# Altium PCB PCB_031K6_V10_AD17.PcbDoc
Units mm, origin at the board's own origin, x right, y up, seen from the top; angles counter-clockwise.
Board outline 36.45 x 71.03 mm, 2 copper layers (Top Layer, Bottom Layer); 63 components, 70 nets, 258 pads, 123 vias.
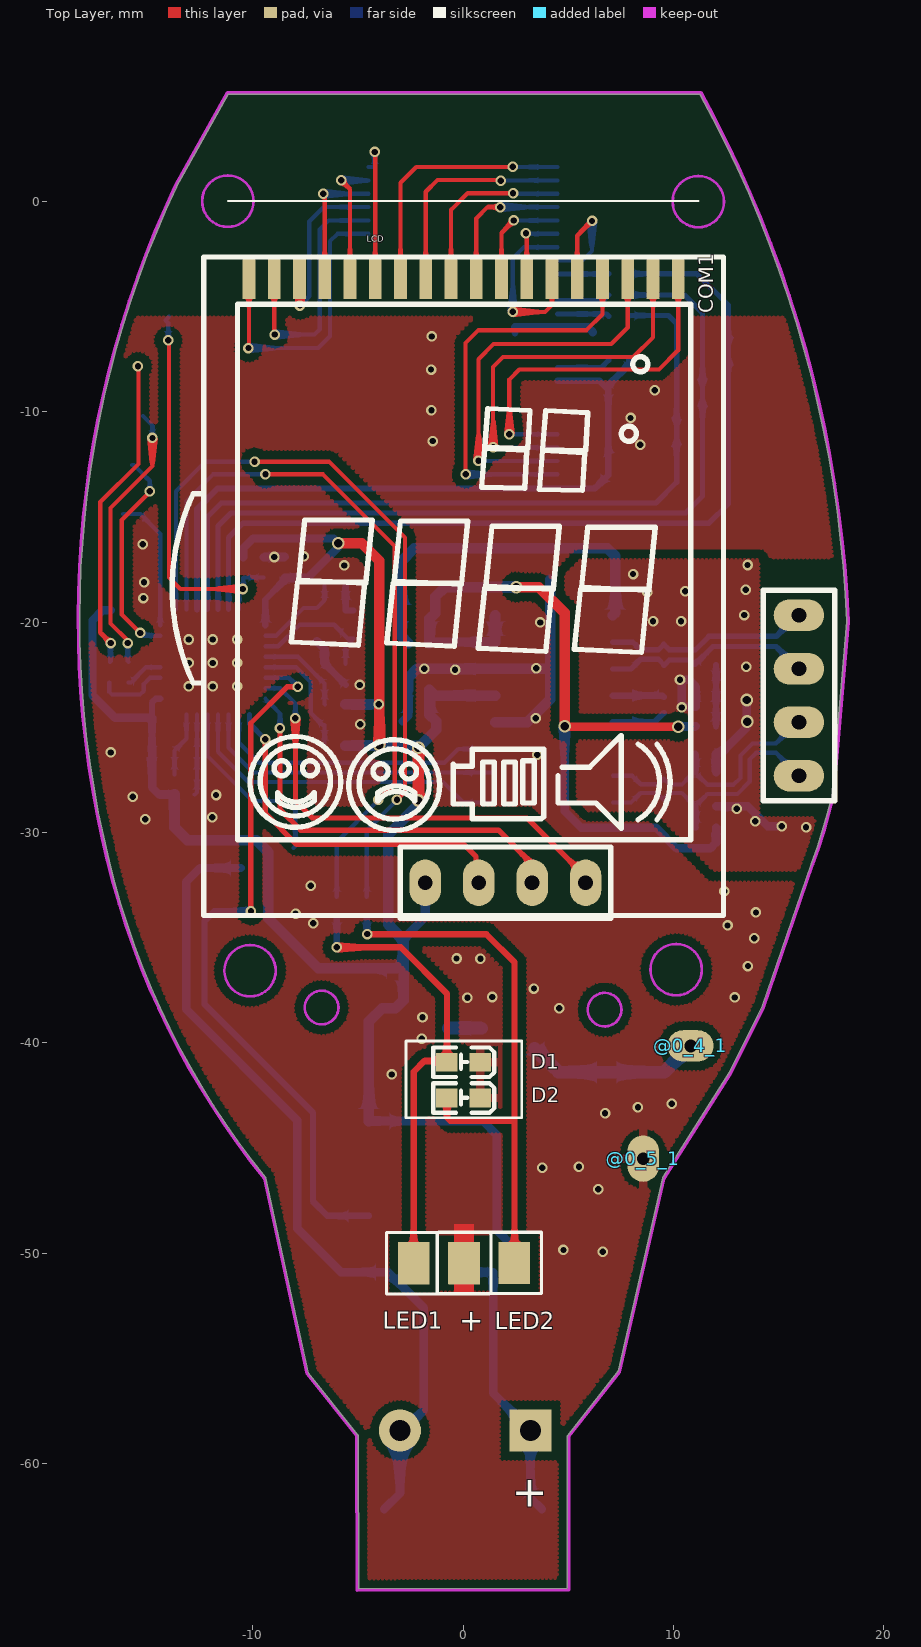
[diagram p0: Top Layer view]
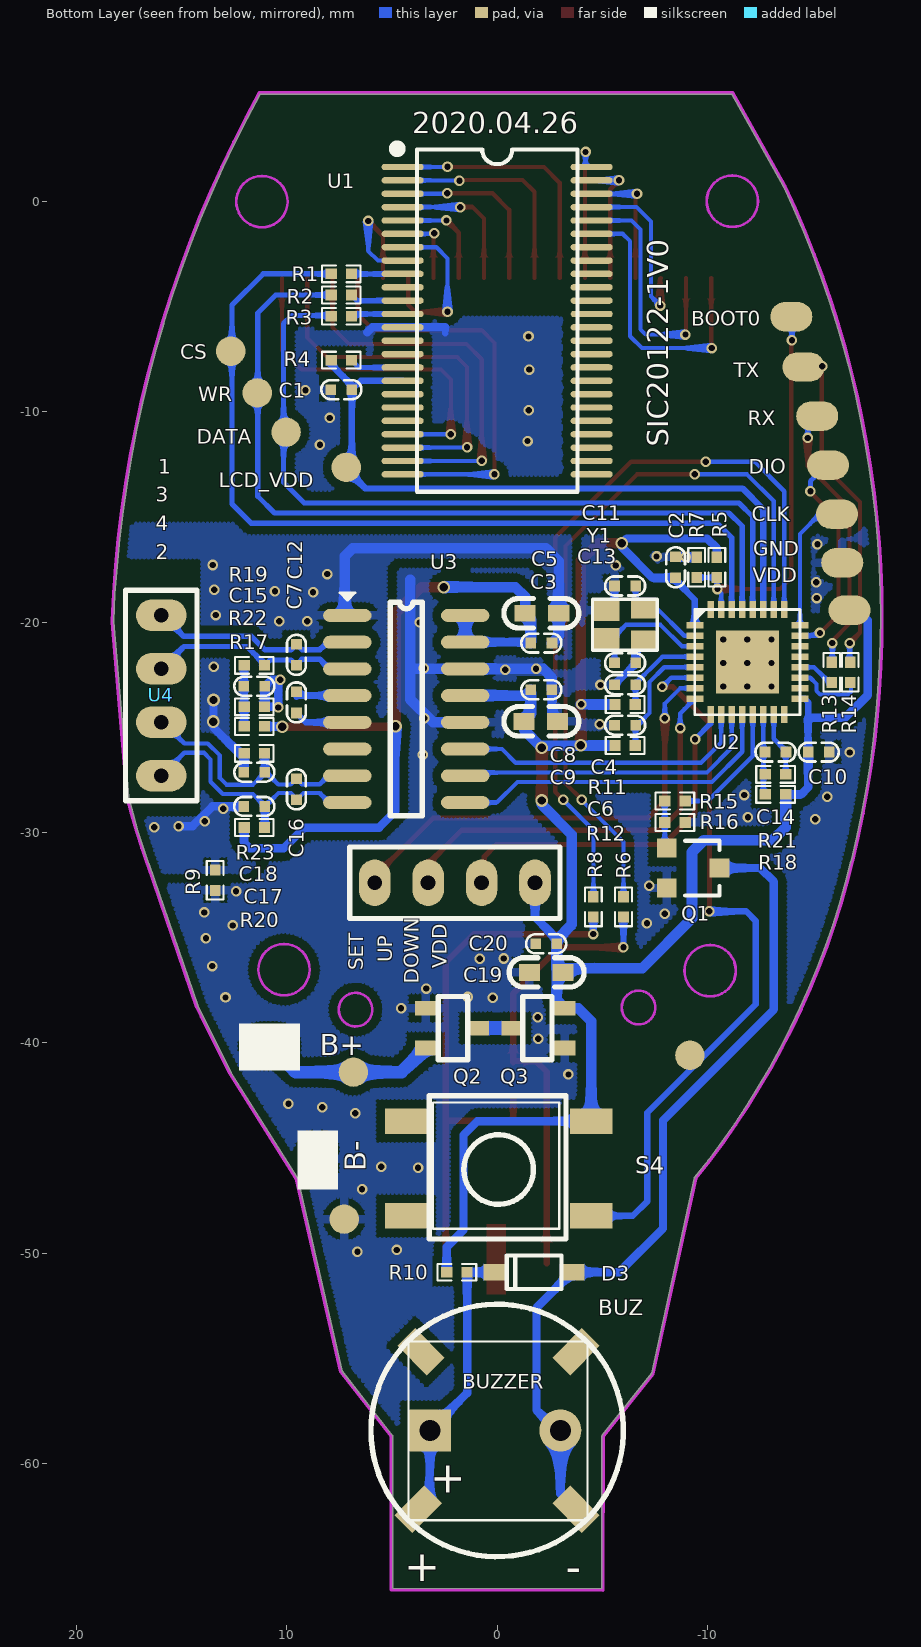
[diagram p1: Bottom Layer view, seen from below]

## Layer stack, top to bottom
Top Solder: solder mask 0.0102, Solder Resist, Dk 3.5
Top Layer: signal copper 0.0356
Dielectric 1: dielectric 0.32, FR-4, Dk 4.8
Bottom Layer: signal copper 0.0356
Bottom Solder: solder mask 0.0102, Solder Resist, Dk 3.5

## Board outline
-7.345,-55.699 -4.999,-58.631 ccw(c-5.058,-58.678) -4.999,-58.631 cw(c-5.058,-58.678) -4.982,-58.678 -4.961,-65.941 4.955,-65.922 4.955,-58.701 cw(c5.03,-58.701) 4.971,-58.654 7.366,-55.606 9.485,-46.421 cw(c9.559,-46.438) 9.495,-46.398 12.646,-41.41 13.995,-38.731 14.207,-38.273 16.536,-31.523 cw(c16.61,-31.539) 16.539,-31.513 ccw(c-10.201,-21.622) 16.546,-31.493 ccw(c-10.201,-21.622) 16.547,-31.491 ccw(c-10.201,-21.622) 17.51,-28.326 cw(c17.584,-28.343) 17.516,-28.31 cw(c17.591,-28.311) 17.516,-28.305 18.231,-19.995 cw(c18.306,-20.001) 18.234,-19.982 cw(c18.305,-19.956) 18.229,-19.959 ccw(c-38.433,-22.235) 11.256,5.093 -11.155,5.093 -13.6,0.714 cw(c-13.666,0.751) -13.607,0.703 cw(c-13.681,0.718) -13.613,0.686 ccw(c29.81,-19.84) -16.819,-31.353 cw(c-16.891,-31.375) -16.818,-31.357 ccw(c20.247,-22.39) -16.814,-31.373 ccw(c20.247,-22.39) -16.813,-31.38 ccw(c20.247,-22.39) -9.389,-46.389 cw(c-9.448,-46.436) -9.386,-46.393 cw(c-9.441,-46.445) -9.367,-46.429

## Design rules (kind name [scope] priority, off if disabled: settings)
Clearance Clearance_1 [InPolygon] p1: gap=0.4 ignorepadtopadclearanceinfootprint=FALSE except(0: Arc-Hole Track-Hole SMDPad-Hole THPad-Hole Via-Hole Fill-Hole Poly-Hole Region-Hole Text-Hole)
Clearance [All] p2: gap=0.18 ignorepadtopadclearanceinfootprint=FALSE except(0: Arc-Hole Track-Hole SMDPad-Hole THPad-Hole Via-Hole Fill-Hole Poly-Hole Region-Hole Text-Hole)
ComponentClearance [All] p1: gap=0 collisioncheckmode=3 verticalgap=0 showdistances=FALSE
HoleToHoleClearance [All] p1 off: gap=0.254 allowstackedmicrovias=TRUE
MinimumSolderMaskSliver [All] p1 off: minsoldermaskwidth=0.254
NetAntennae [All] p1 off: netantennaetolerance=0
PolygonConnect PolygonConnect_1 [IsVia] p1: connectstyle=Direct reliefconductorwidth=0.254 reliefentries=4 polygonreliefangle="90 Angle" airgapwidth=0.254
PolygonConnect [All] p2: connectstyle=Relief reliefconductorwidth=0.4 reliefentries=4 polygonreliefangle="90 Angle" airgapwidth=0.3
RoutingCorners [All] p1: cornerstyle=45-Degree minsetback=0.2 maxsetback=0.2
RoutingVias [All] p1: holewidth=0.711 width=1.27 viastyle="Through Hole" minholewidth=0.3 minwidth=0.5 maxholewidth=0.711 maxwidth=1.27
SilkToSilkClearance [All] p1 off: silktosilkclearance=0.254
SilkToSolderMaskClearance [IsPad] p1 off: minsilkscreentomaskgap=0.254 clearancetoexposedcopper=TRUE
SolderMaskExpansion [All] p1: expansion=0.102
Width [All] p1: maxlimit=2 minlimit=0.2 preferedwidth=0.254 minimp=50.000000 maximp=50.000000 favimp=50.000000
23 further rules are at their usual default settings.

## Components (designator, comment, footprint, x,y, rotation, side; value= is the part's Value field where it differs from the comment)
@0_4_1 "FPAD_2" FPAD_2 10.814,-40.146 r180 top
@0_5_1 "FPAD_2" FPAD_2 8.56,-45.503 r90 top
BUZ "Bell" BUZZER_552 1.713,-60.389 r270 bottom locked
BUZ1 "BUZZER" BUZZERA 3.199,-58.42 r180 bottom
C1 "105" 0402C 7.403,-8.955 r180 bottom
C2 "105" 0402C -8.48,-17.4 r90 bottom
C3 "120pF" 0402C -2.102,-21 r180 bottom
C4 "105" 0402C -6.08,-22.977 r0 bottom
C5 "105" 0603C -2.127,-19.58 r0 bottom
C6 "105" 0402C -6.08,-24.9 r0 bottom
C7 "104" 0402C 9.54,-23.82 r90 bottom
C8 "104" 0402C -2.102,-23.22 r0 bottom
C9 "10uF" 0603C -2.077,-24.72 r180 bottom
C10 "105" 0402C -15.28,-26.18 r180 bottom
C11 "20pF" 0402C -6.08,-18.286 r0 bottom
C12 "104" 0402C 9.54,-21.56 r270 bottom
C13 "20pF" 0402C -6.08,-21.938 r180 bottom
C14 "105" 0402C -13.23,-26.18 r180 bottom
C15 "104" 0402C 11.54,-23.05 r180 bottom
C16 "104" 0402C 9.54,-27.952 r270 bottom
C17 "NC" 0402C 11.54,-28.764 r0 bottom
C18 "NC" 0402C 11.54,-27.14 r180 bottom
C19 "106" 0603C -2.327,-36.65 r180 bottom
C20 "104" 0402C -2.327,-35.292 r0 bottom
D1 "GREEN" LED3(1和2标识) 0.024,-40.92 r90 top
D2 "RED" LED3(1和2标识) 0.024,-42.62 r90 top
D3 "1N4148" SOD-123 -1.758,-50.901 r0 bottom
LCD "" LCDHT02958 -12.321,-2.65 r0 top locked
Q1 "NPN" SOT-23(OK) -9.31,-31.69 r270 bottom
Q2 "AO3401" MOS管 2.095,-39.299 r270 bottom
Q3 "AO3401" MOS管 -1.912,-39.299 r90 bottom
R1 "100" 0402R 7.403,-3.454 r90 bottom
R2 "100" 0402R 7.403,-4.461 r90 bottom
R3 "100" 0402R 7.403,-5.467 r90 bottom
R4 "100" 0402R 7.403,-7.557 r90 bottom
R5 "NC" 0402R -10.44,-17.4 r180 bottom
R6 "100" 0402R -6,-33.54 r180 bottom
R7 "10K" 0402R -9.48,-17.4 r180 bottom
R8 "100" 0402R -4.573,-33.54 r180 bottom
R9 "0R" 0402R 13.4,-32.27 r180 bottom
R10 "100" 0402R 1.911,-50.901 r270 bottom
R11 "10K" 0402R -6.08,-23.917 r90 bottom
R12 "0000" 0402R -6.08,-25.87 r90 bottom
R13 "100" 0402R -15.901,-22.39 r0 bottom
R14 "100" 0402R -16.78,-22.39 r0 bottom
R15 "10K" 0402R -8.451,-28.505 r270 bottom
R16 "100K" 0402R -8.451,-29.525 r90 bottom
R17 "15K,1%" 0402R 11.54,-24.96 r90 bottom
R18 "1M,1%" 0402R -13.23,-28.19 r90 bottom
R19 "1K" 0402R 11.54,-22.06 r90 bottom
R20 "51K,1%" 0402R 11.54,-29.764 r270 bottom
R21 "1M,1%" 0402R -13.23,-27.24 r270 bottom
R22 "10K,1%" 0402R 11.54,-24.03 r270 bottom
R23 "51K,1%" 0402R 11.54,-26.24 r270 bottom
S4 "Measure" TACTSWITCH6X6 -0.072,-46.12 r0 bottom locked
U1 "SC1621" SSOP48 0,-13.808 r270 bottom locked
U2 "031K6" QFN32(5*5) -11.895,-21.901 r180 bottom locked
U3 "CS1259B" SOP16 7.119,-19.687 r180 bottom locked
U4 "IR" 4P#1 15.96,-23.49 r180 bottom locked
U4 "IR" 4P#2 2.011,-32.39 r270 bottom
Y1 "8MHZ" 3225 -6.08,-20.124 r180 bottom
? "LED1" LED1 0.05,-50.473 r0 top
? "LED1$2F$2" LED1$2F$2 0.043,-50.454 r180 top

## Footprints (in the part's own frame and the unit in brackets; to place one, negate y for a bottom-side part, rotate by r counter-clockwise, add the part's x,y. Pads: shape width x height; smd on the part's side, far side on the other; paste and mask are expansions set on the pad)
4P#1 [mm]
  oval 2.4x1.5 hole 0.7: 1(0,3.81) 2(0,1.27) 3(0,-1.27) 4(0,-3.81)
  silkscreen extent -1.7,-5 1.7,5
4P#2 [mm]
  oval 2.2x1.5 hole 0.7: 1(0,3.81) 2(0,1.27) 3(0,-1.27) 4(0,-3.81)
  silkscreen extent -1.7,-5 1.7,5
0402C [mil]
  rect 20x20 smd: 1(19.69,0) 2(-19.68,0)
  silkscreen extent -37,-18 37,18, body extent -20,-10 20,10, height 13
0402R [mm]
  rect 0.508x0.535 smd: 1(0,0.483) 2(0,-0.483)
  silkscreen extent -0.4,-0.92 0.4,0.92, body extent -0.25,-0.49 0.24,0.5, height 0.49
0603C [mm]
  rect 1x0.8 smd: 1(-0.8,0) 2(0.8,0)
  silkscreen extent -1.76,-0.7 1.81,0.7, body extent -0.8,-0.4 0.8,0.4, height 0.83
3225 [mm]
  rect 1.2x1 smd: 1(-0.87,-0.67) 2(0.87,-0.79) 3(0.87,0.79) 4(-0.87,0.675)
  silkscreen extent -1.55,-1.22 1.53,1.21
BUZZER_552 [mm]
  rect 2x1.2 smd rot 135: 1(1.778,-2.032) 2(-5.715,5.461)
  rect 2x1.2 smd rot 45: G(-5.715,-1.905) G(1.778,5.461)
  silkscreen extent -6.2,-2.5 2.3,6
BUZZERA [mm]
  rect 2x2 hole 1: 1(0,0)
  round 2 hole 1: 2(6.2,0)
  silkscreen extent -2.8,-6 9.2,6
FPAD_2 [mm]
  oval 2.2x1.5 hole 0.6: 1(0,0)
LCDHT02958 [mm]
  rect 0.6x2 smd: 1(2.15,-1) 2(3.35,-1) 3(4.55,-1) 4(5.75,-1) 5(6.95,-1) 6(8.15,-1) 7(9.35,-1) 8(10.55,-1) 9(11.75,-1) 10(12.95,-1) 11(14.15,-1) 12(15.35,-1) 13(16.55,-1) 14(17.75,-1) 15(18.95,-1) 16(20.15,-1) 17(21.35,-1) 18(22.55,-1)
  silkscreen extent -1.5,-31.3 24.7,0
LED1 [mm]
  rect 1.5x2 smd: 1(0,0) 2(-2.4,0)
  silkscreen extent -3.68,-1.46 1.27,1.46
LED1$2F$2 [mm]
  rect 1.5x2 smd: 1(0,0) 2(-2.4,0)
  silkscreen extent -3.68,-1.46 1.27,1.46
LED3(1和2标识) [mil]
  rect 35x40 smd: 1(0,31.13) 2(0,-31.13)
  silkscreen extent -28,-58 27,57
MOS管 [mm]
  rect 0.7x1 smd: 1(-0.95,-1.3) 2(0.95,-1.3) 3(0,1.2)
  silkscreen extent -1.5,-0.7 1.5,0.7
QFN32(5*5) [mm]
  rect 0.8x0.3 smd: 1(-2.5,1.75) 2(-2.5,1.25) 3(-2.5,0.75) 4(-2.5,0.25) 5(-2.5,-0.25) 6(-2.5,-0.75) 7(-2.5,-1.25) 8(-2.5,-1.75) 17(2.5,-1.75) 18(2.5,-1.25) 19(2.5,-0.75) 20(2.5,-0.25) 21(2.5,0.25) 22(2.5,0.75) 23(2.5,1.25) 24(2.5,1.75)
  rect 0.3x0.8 smd: 9(-1.75,-2.5) 10(-1.25,-2.5) 11(-0.75,-2.5) 12(-0.25,-2.5) 13(0.25,-2.5) 14(0.75,-2.5) 15(1.25,-2.5) 16(1.75,-2.5) 25(1.75,2.5) 26(1.25,2.5) 27(0.75,2.5) 28(0.25,2.5) 29(-0.25,2.5) 30(-0.75,2.5) 31(-1.25,2.5) 32(-1.75,2.5)
  rect 3x3 smd: ""(0,0)
  silkscreen extent -2.5,-2.5 2.5,2.5
SOD-123 [mm]
  rect 1.2x0.8 smd: 1(-1.8,0) 2(1.8,0)
  silkscreen extent -1.3,-0.8 1.3,0.8, body extent -1.85,-0.8 1.85,0.8, height 1.2
SOP16 [mm]
  oval 2.3x0.61 smd: 1(0,0) 2(0,-1.27) 3(0,-2.54) 4(0,-3.81) 5(0,-5.08) 6(0,-6.35) 7(0,-7.62) 8(0,-8.89) 9(5.6,-8.89) 10(5.6,-7.62) 11(5.6,-6.35) 12(5.6,-5.08) 13(5.6,-3.81) 14(5.6,-2.54) 15(5.6,-1.27) 16(5.6,0)
  silkscreen extent -0.36,-9.53 3.56,1.08
SOT-23(OK) [mm]
  rect 0.9x0.95 smd: 1(-0.95,-1.25) 2(0,1.25) 3(0.95,-1.25)
  silkscreen extent -1.3,-0.38 1.3,1.25
SSOP48 [mm]
  oval 0.305x2 smd: 1(-15.431,-4.491) 2(-14.797,-4.491) 3(-14.162,-4.491) 4(-13.527,-4.491) 5(-12.891,-4.491) 6(-12.257,-4.491) 7(-11.622,-4.491) 8(-10.986,-4.491) 9(-10.352,-4.491) 10(-9.717,-4.491) 11(-9.081,-4.491) 12(-8.446,-4.491) 13(-7.812,-4.491) 14(-7.177,-4.491) 15(-6.542,-4.491) 16(-5.907,-4.491) 17(-5.272,-4.491) 18(-4.636,-4.491) 19(-4.002,-4.491) 20(-3.367,-4.491) 21(-2.731,-4.491) 22(-2.096,-4.491) 23(-1.462,-4.491) 24(-0.826,-4.491) 25(-0.827,4.491) 26(-1.461,4.491) 27(-2.097,4.491) 28(-2.732,4.491) 29(-3.367,4.491) 30(-4.002,4.491) 31(-4.637,4.491) 32(-5.271,4.491) 33(-5.906,4.491) 34(-6.542,4.491) 35(-7.177,4.491) 36(-7.811,4.491) 37(-8.447,4.494) 38(-9.082,4.491) 39(-9.717,4.491) 40(-10.352,4.491) 41(-10.987,4.491) 42(-11.621,4.491) 43(-12.256,4.491) 44(-12.892,4.491) 45(-13.526,4.491) 46(-14.161,4.491) 47(-14.797,4.491) 48(-15.432,4.491)
  silkscreen extent -16.5,-4.95 0,3.81
TACTSWITCH6X6 [mm]
  rect 2x1.2 smd: 1(-4.4,2.1) 2(-4.4,-2.4) 3(4.4,2.1) 4(4.4,-2.4)
  silkscreen extent -3.2,-3.6 3.3,3.2

## Part data
BUZ: "Electrical Bell"
BUZ1: library part Speaker
C1 C2 C3 C4 C5 C6 C7 C8 C9 C10 C11 C12 C13 C14 C15 C16 C17 C18 C19 C20: library part Cap, "Capacitor"
D1 D2: library part LED0, "Typical INFRARED GaAs LED"
D3: library part Diode, "Default Diode"
LCD: library part LCD-4*14, "LCD Displayer"
Q1: "NPN Bipolar Transistor"
Q2 Q3: library part PMOS-2, "P-Channel Power MOSFET"
R1 R2 R3 R4 R5 R6 R7 R8 R9 R10 R11 R12 R13 R14 R15 R16 R17 R18 R19 R20 R21 R22 R23: library part Res1, "Resistor"
S4: library part SW-PB, "Switch"
U1: "32X4 LCD Driver"
U2: library part STM32F031K6, "CM0 UFQFPN32"
U3: "chipsea SD ADC"
U4 U4: library part Sensor, "ntc ,TP"
Y1: library part XTAL, "Crystal Oscillator"

## Free pads (board coordinates)
  round 1.4 smd far side: 2(-9.16,-40.59) 2(6.83,-41.39) 2(7.27,-48.374) 4(7.169,-12.65) 4(10.03,-10.976) 4(11.4,-9.11) 4(12.66,-7.13)
  oval 2x1.4 smd far side: 4(-16.75,-19.44) 4(-16.4,-17.18) 4(-16.15,-14.87) 4(-15.72,-12.54) 4(-15.21,-10.21) 4(-14.56,-7.88) 4(-13.98,-5.49)

## Via types
v1: diameter 0.5, hole 0.3, Top Layer to Bottom Layer, 114 vias
v2: diameter 0.6, hole 0.4, Top Layer to Bottom Layer, 9 vias

## Nets (pads, with @x,y where several pads share a name; then routed paths per layer and width w, separated by ;. In a path a pad name is that pad's centre, name@x,y a point inside that pad or via, vN(x,y) a via of type N, cw(c..) or ccw(c..) an arc to the next point about the centre after c; other vN are vias at no path point)
AGND: C3.1 C5.1 C15.1 C17.1 C18.2 R9.1 R22.1 R23.2 U3.1 | length 29
  Bottom Layer w0.4: C17.1 13.534,-28.764 14.47,-29.7 v1(15.14,-29.7) ; C18.2 12.023,-27.123 R23.2 12.25,-26.24 13.48,-25.01 v2(13.48,-23.704) ; v1(10.31,-22.74) 10.73,-22.74 C15.1 11.04,-24.014 R22.1 10.43,-24.03 v1(10.401,-24.06) 10.401,-22.831 v1(10.31,-22.74)
  Bottom Layer w0.5: C3.1 -2.927,-20.675 C5.1 -2.927,-17.107 -2.32,-16.5 6.86,-16.5 7.243,-16.883 7.243,-17.71 7.243,-19.563 U3.1
  other v1: 16.3,-29.76 13.89,-29.47 13.01,-28.88 13.464,-22.13 9.029,-19.96 10.36,-19.97 13.369,-19.67 8.75,-18.59 10.56,-18.53 13.44,-18.464 8.08,-17.72 13.52,-17.29
  other v2: 13.5,-24.73
AI0: C12.2 U3.2 U4.1@15.96,-19.68 | length 9.9
  Bottom Layer w0.25: U3.2 8.067,-20.957 8.43,-21.32 9.28,-21.32 C12.2 9.803,-21.323 11.037,-21.323 11.68,-20.68 14.89,-20.68 15.89,-19.68 U4.1@15.96,-19.68
AI1: C12.1 R19.2 U3.3 U4.2@15.96,-22.22 | length 10.2
  Bottom Layer w0.25: U3.3 7.973,-22.227 8.43,-21.77 9.282,-21.77 9.54,-22.028 C12.1 9.543,-22.06 9.8,-21.803 10.8,-21.803 11.021,-22.024 11.881,-21.164 14.884,-21.164 15.94,-22.22 U4.2@15.96,-22.22
AIN0: 
AIN1: 
AIN2: C16.1 C17.2 R20.1 U3.8 U4.4@15.96,-27.3 | length 12.8
  Bottom Layer w0.2: U3.8 7.984,-28.577 8.441,-28.12 9.208,-28.12 C16.1 9.54,-28.378 9.798,-28.12 10.396,-28.12 C17.2 ; C17.2@11.028,-28.751 11.609,-28.17 13.04,-28.17 13.62,-27.59 13.62,-26.527 13.937,-26.21 14.87,-26.21 U4.4@15.96,-27.3
  Bottom Layer w0.3: C17.2 11.04,-29.747 R20.1
AIN3: C16.2 C18.1 R23.1 U3.7 U4.3@15.96,-24.76 | length 12.5
  Bottom Layer w0.2: U3.7 8.037,-27.307 8.44,-27.71 9.282,-27.71 C16.2 9.808,-27.72 10.401,-27.72 10.981,-27.14 C18.1 ; C18.1@11.027,-27.152 11.605,-27.73 12.858,-27.73 13.18,-27.408 13.18,-26.345 13.755,-25.77 14.87,-25.77 15.88,-24.76 U4.3@15.96,-24.76 ; R23.1@11.04,-26.257 R23.1
  Bottom Layer w0.3: C18.1 R23.1@11.04,-26.257
BOOT0: pad.4@-13.98,-5.49 R5.2 R7.2 U2.31 | length 18.8
  Top Layer w0.2: v1@-13.98,-6.6 -13.98,-17.89 -13.44,-18.43 v1(-10.47,-18.43)
  Bottom Layer w0.2: v1(-14.01,-6.61) -14.01,-5.796 -14.148,-5.658 pad.4@-13.98,-5.49 ; U2.31 -10.645,-18.635 -10.44,-18.43 R5.2 R7.2
BOOT1: 
COM0: LCD.18 U1.21 | length 16.9
  Top Layer w0.2: v1@2.2,-11.08 2.2,-8.47 2.67,-8 9.31,-8 10.229,-7.081 LCD.18
  Bottom Layer w0.2: v1@2.2,-11.08 2.204,-11.076 U1.21
  other v1: 2.2,-11.076
COM1: LCD.17 U1.22 | length 17.9
  Top Layer w0.2: v1@1.43,-11.66 1.43,-7.88 1.9,-7.41 8.09,-7.41 9.029,-6.471 LCD.17
  Bottom Layer w0.2: v1@1.43,-11.66 1.481,-11.711 U1.22
  other v1: 1.43,-11.69
COM2: LCD.16 U1.23 | length 18.6
  Top Layer w0.2: v1@0.71,-12.26 0.73,-12.24 0.73,-7.51 1.45,-6.79 7.04,-6.79 7.829,-6.001 LCD.16
  Bottom Layer w0.2: v1@0.744,-12.346 U1.23
  other v1: 0.73,-12.33
COM3: LCD.15 U1.24 | length 19.4
  Top Layer w0.2: v1@0.12,-12.94 0.12,-6.74 0.73,-6.13 5.87,-6.13 6.629,-5.371 LCD.15
  Bottom Layer w0.2: v1(0.129,-12.981) U1.24
GND: ?.1 @0_5_1.1 C1.2 C2.1 C4.1 C6.1 C8.2 C9.2 C10.1 C11.1 C13.1 C19.1 C20.1 D1.2 D2.2 pad.2@7.27,-48.374 pad.4@-16.4,-17.18 Q1.3 Q2.1 Q3.1 R7.1 R9.2 R16.2 U1.13 U2. U3.12 U3.14 Y1.2 Y1.4 | length 27
  Bottom Layer w0.3: C13.1@-6.58,-21.978 -6.579,-21.978 C4.1 ; C11.1 -5.58,-19.449 Y1.4 ; 2.47,-6.27 2.47,-5.996
  Bottom Layer w0.4: R7.1 -8.497,-16.917 C2.1 ; Y1.2 -6.58,-21.284 C13.1@-6.58,-21.978 ; C9.2 -2.602,-24.445 C8.2 ; 2.47,-5.996 5.944,-5.996 6.169,-6.221
  Bottom Layer w0.5: C8.2 -2.602,-22.642 -2.187,-22.227 U3.14 4.06,-22.227 ; U3.12 3.043,-24.767 4.14,-23.67 4.14,-21.54 ; 4.14,-21.51 4.14,-17.98
  other v1: 6.64,-49.92 4.77,-49.84 6.42,-46.95 3.76,-45.94 5.507,-45.88 6.75,-43.34 8.31,-43.058 9.92,-42.9 -3.388,-41.5 -1.96,-39.8 -1.927,-38.781 4.569,-38.349 0.21,-37.854 12.91,-37.84 1.39,-37.82 3.369,-37.42 13.54,-36.35 -0.308,-35.99 0.828,-36.001 13.84,-35.03 12.57,-34.42 -7.12,-34.31 -7.96,-33.87 13.92,-33.8 12.409,-32.795 -7.231,-32.54 -15.11,-29.37 -11.92,-29.28 -15.69,-28.3 -11.74,-28.22 3.53,-26.31 -16.75,-26.2 -4.88,-24.86 3.46,-24.57 -13.04,-23.063 -11.89,-23.063 -10.74,-23.063 -4.91,-22.989 -0.38,-22.269 -1.85,-22.221 3.48,-22.2 -13.04,-21.946 -11.89,-21.946 -10.74,-21.946 -13.04,-20.83 -11.89,-20.83 -10.74,-20.83 3.675,-20.02 -15.19,-18.86 -15.16,-18.11 -5.64,-17.311 -8.97,-16.91 -7.574,-16.883 -15.22,-16.3 8.42,-11.58 -1.446,-11.4 7.96,-10.3 -1.501,-9.93 9.11,-8.99 -1.52,-8 -1.49,-6.43
NetBUZ_1: BUZ1.1 BUZ.1 D3.2 R10.1 | length 13.6
  Bottom Layer w0.4: D3.2 R10.1 1.428,-56.649 BUZ1.1 3.199,-61.62 BUZ.1
NetBUZ_2: BUZ1.2 BUZ.G@-3.748,-62.167 D3.1 Q1.2 | length 39.5
  Bottom Layer w0.4: Q1.2 -12.5,-31.69 -13.15,-32.34 -13.15,-38.41 -7.88,-43.68 -7.88,-48.82 -5.799,-50.901 D3.1 -1.87,-52.59 -1.87,-57.45 -2.84,-58.42 BUZ1.2 -3.002,-61.42 BUZ.G@-3.748,-62.167
NetC7_1: C7.1 U3.4 | length 2.4
  Bottom Layer w0.3: U3.4 9.477,-23.497 C7.1@9.54,-23.56
NetC7_2: C7.2 U3.5 | length 2.6
  Bottom Layer w0.3: U3.5 9.093,-24.767 C7.2
NetC15_2: C15.2 R17.1 R19.1 R22.2 | length 2.9
  Bottom Layer w0.3: R17.1 R22.2 R19.1
NetD1_1: ?.2@-2.35,-50.473 D1.1 R6.2 | length 21.8
  Top Layer w0.3: v1(-6,-35.46) -2.959,-35.46 -0.767,-37.652 D1.1 -0.827,-40.86 -1.84,-40.86 -2.35,-41.37 ?.2@-2.35,-50.473
  Bottom Layer w0.3: v1(-6,-35.46) R6.2
NetD2_1: ?.2@2.443,-50.455 D2.1 R8.2 | length 26.9
  Top Layer w0.3: v1@-4.6,-34.84 1.11,-34.84 2.443,-36.173 2.443,-43.65 ; D2.1 -0.767,-43.543 -0.61,-43.7 2.393,-43.7 2.443,-43.65 ; ?.2@2.443,-50.455 2.443,-43.65
  Bottom Layer w0.3: v1@-4.573,-34.817 R8.2
  Bottom Layer w0.4: v1@-4.573,-34.817 v1(-4.56,-34.83)
NetQ1_2: Q1.1 R15.2 R16.1 | length 2.3
  Bottom Layer w0.2: Q1.1 -7.968,-30.648 R15.2
NetQ2_2: Q2.3 Q3.3 | length 1.6
  Bottom Layer w0.6: Q3.3 Q2.3
NetR1_2: R1.2 U1.9 | length 2.4
  Bottom Layer w0.25: U1.9 6.917,-3.456 R1.2
NetR2_2: R2.2 U1.11 | length 2.5
  Bottom Layer w0.25: U1.11 6.654,-4.726 R2.2
NetR3_2: R3.2 U1.12 | length 2.5
  Bottom Layer w0.25: U1.12 6.813,-5.361 R3.2
NetR4_2: R4.2 U1.16 | length 2.6
  Bottom Layer w0.25: U1.16 6.575,-7.901 R4.2
NRST: C4.2 R11.2 U2.4 | length 4.3
  Bottom Layer w0.2: U2.4 -7.849,-21.651 -6.58,-22.92 C4.2 -6.58,-23.901 R11.2
PA0: pad.2@-9.16,-40.59 S4.1 U2.6 | length 34.4
  Top Layer w0.25: v1(-10.08,-33.75) -10.09,-33.74 -10.09,-24.81 -8.36,-23.08 v1(-7.849,-23.08)
  Bottom Layer w0.2: U2.6 -8.278,-22.651 v1(-7.849,-23.08)
  Bottom Layer w0.3: v1(-10.08,-33.75) -11.83,-33.75 -12.29,-34.21 -12.29,-38.16 -7.13,-43.32 -7.13,-47.54 -6.45,-48.22 S4.1
PA1: U2.7 U4.4@5.821,-32.39 | length 21.9
  Top Layer w0.25: v1@-7.968,-24.63 -7.968,-28.505 -7.163,-29.31 3.04,-29.31 5.77,-32.04 U4.4@5.77,-32.41
  Bottom Layer w0.2: U2.7 -8.689,-23.151 -7.968,-23.872 v1(-7.968,-24.58)
PA2: U2.8 U4.3@3.281,-32.39 | length 19.5
  Top Layer w0.25: v1@-8.701,-25.05 -8.701,-28.905 -7.716,-29.89 1.68,-29.89 3.281,-31.491 U4.3@3.281,-32.41
  Bottom Layer w0.2: U2.8 -8.7,-24.346 v1(-8.7,-25.04)
PA3: U2.9 U4.2@0.741,-32.39 | length 17.1
  Top Layer w0.25: v1@-9.4,-25.59 -9.4,-29.08 -7.91,-30.57 0.04,-30.57 0.61,-31.14 U4.2@0.61,-32.41
  Bottom Layer w0.25: U2.9 -10.145,-24.83 v1(-9.405,-25.57)
PA4: U2.10 U3.11 | length 14.2
  Bottom Layer w0.2: U2.10 -10.645,-25.735 -9.69,-26.69 -0.88,-26.69 -0.227,-26.037 U3.11
PA5: U2.11 U3.10 | length 14.8
  Bottom Layer w0.2: U2.11 -11.145,-25.975 -9.97,-27.15 1.362,-27.15 U3.10
PA6: U2.12 U3.9 | length 15.9
  Bottom Layer w0.2: U2.12 -11.645,-26.165 -10.21,-27.6 -0.96,-27.6 0.017,-28.577 U3.9
PA7: R15.1 U2.13 | length 6.1
  Bottom Layer w0.2: U2.13 -12.145,-26.37 -10.01,-28.505 R15.1
PA9: R14.1 U2.19 | length 3.4
  Bottom Layer w0.2: R14.1@-16.81,-22.873 -16.81,-23.32 -16.68,-23.45 -15.35,-23.45 -15.17,-23.27 -15.17,-22.944 -14.877,-22.651 U2.19
PA10: R13.1 U2.20 | length 1.8
  Bottom Layer w0.2: R13.1 -15.783,-22.873 -15.061,-22.151 U2.20
PA15: R8.1 U2.25 | length 36.4
  Top Layer w0.2: v1(-9.91,-12.38) -6.371,-12.38 -2.76,-15.991 -2.76,-28.07 v1(-3.14,-28.45)
  Bottom Layer w0.2: U2.25 -13.645,-13.785 -12.24,-12.38 v1(-9.91,-12.38) ; R8.1 -4.573,-29.893 -3.14,-28.46 v1(-3.14,-28.45)
PB0: C14.2 R18.1 R21.2 U2.14 | length 3.8
  Bottom Layer w0.2: R18.1 -12.645,-28.088 U2.14
PB1: C14.1 R21.1 U2.15 | length 3.1
  Bottom Layer w0.2: R21.1 -13.713,-26.113 -13.145,-25.545 U2.15
PB3: R6.1 U2.26 | length 34.7
  Top Layer w0.2: v1(-9.39,-12.98) -6.65,-12.98 -3.25,-16.38 -3.25,-27.67 v1(-4.02,-28.44)
  Bottom Layer w0.2: U2.26 -13.145,-14.245 -11.88,-12.98 v1(-9.39,-12.98) ; R6.1 -6,-30.45 v1@-4.06,-28.51
PB4: C1.1 pad.4@7.169,-12.65 R4.1 U1.17 U2.27 | length 33.4
  Bottom Layer w0.3: U2.27 -12.645,-14.634 -11.661,-13.65 6.27,-13.65 6.903,-13.017 C1.1 ; U1.17 6.484,-8.536 C1.1 ; R4.1 7.886,-7.764 6.903,-8.747 C1.1
PB5: pad.4@10.03,-10.976 R3.1 U2.28 | length 37.4
  Bottom Layer w0.25: U2.28 -12.145,-14.995 -11.49,-14.34 9.17,-14.34 10.15,-13.36 10.15,-5.82 9.76,-5.43 7.923,-5.43 R3.1
PB6: pad.4@11.4,-9.11 R2.1 U2.29 | length 40.1
  Bottom Layer w0.25: U2.29 -11.645,-15.445 -11.02,-14.82 10.58,-14.82 11.38,-14.02 11.38,-5.32 10.521,-4.461 R2.1
PB7: pad.4@12.66,-7.13 R1.1 U2.30 | length 42.6
  Bottom Layer w0.25: U2.30 -11.145,-15.985 -10.46,-15.3 11.69,-15.3 12.6,-14.39 12.6,-4.94 11.114,-3.454 R1.1
PF0: C11.2 U2.2 Y1.3 | length 4.2
  Bottom Layer w0.2: U2.2 -8.891,-20.651 -7.574,-19.334 Y1.3 -6.58,-18.964 C11.2
PF1: C13.2 U2.3 Y1.1 | length 6.2
  Bottom Layer w0.2: U2.3 -8.781,-21.151 -7.764,-20.134 -6.126,-20.134 -5.466,-20.794 Y1.1 -5.58,-21.164 C13.2@-5.58,-21.978
RX: pad.4@-15.21,-10.21 R13.2 | length 13.2
  Top Layer w0.2: v1(-15.93,-21) -15.93,-20.89 -16.75,-20.07 -16.75,-14.58 -14.76,-12.59 v1(-14.76,-11.25) v1@-14.76,-11.14
  Bottom Layer w0.2: v1(-15.93,-21) -15.93,-21.878 R13.2 ; pad.4@-15.21,-10.21 -14.76,-10.66 v1(-14.76,-11.25)
SEG0: LCD.14 U1.8 | length 6.3
  Top Layer w0.2: LCD.14 5.429,-1.641 v1(6.13,-0.94)
  Bottom Layer w0.2: U1.8 5.669,-2.821 6.13,-2.36 v1(6.13,-0.94)
SEG1: LCD.13 U1.7 | length 8.2
  Top Layer w0.2: v1(2.36,-5.26) 3.89,-5.26 4.229,-4.921 LCD.13
  Bottom Layer w0.2: v1(2.36,-5.26) 2.36,-2.72 2.894,-2.186 U1.7
SEG2: LCD.12 U1.6 | length 3.6
  Top Layer w0.2: v1(2.99,-1.53) 3.029,-1.569 LCD.12
  Bottom Layer w0.2: v1@2.99,-1.57 3.009,-1.551 U1.6
SEG3: LCD.11 U1.5 | length 5.1
  Top Layer w0.2: LCD.11 1.829,-1.497 v1(2.41,-0.916)
  Bottom Layer w0.2: v1(2.41,-0.916) U1.5
SEG4: LCD.10 U1.4 | length 6.9
  Top Layer w0.2: LCD.10 0.629,-0.821 1.169,-0.281 v1(1.761,-0.281)
  Bottom Layer w0.2: U1.4 v1(1.761,-0.281) ; v1@1.76,-0.28 v1(1.761,-0.281)
SEG5: LCD.9 U1.3 | length 8.6
  Top Layer w0.2: LCD.9 -0.571,-0.411 0.22,0.38 v1(2.376,0.38)
  Bottom Layer w0.2: v1@2.376,0.34 2.39,0.354 U1.3
SEG6: LCD.8 U1.2 | length 10.7
  Top Layer w0.2: LCD.8 -1.771,0.449 -1.21,1.01 1.72,1.01 v1@1.81,0.92
  Bottom Layer w0.2: v1(1.79,0.971) 1.808,0.989 U1.2
SEG7: LCD.7 U1.1 | length 12.3
  Top Layer w0.2: LCD.7 -2.971,0.879 -2.226,1.624 2.294,1.624 v1@2.36,1.69
  Bottom Layer w0.2: v1(2.36,1.64) 2.376,1.624 U1.1
SEG8: LCD.6 U1.48 | length 7
  Top Layer w0.2: v1(-4.2,2.34) -4.171,2.311 LCD.6
  Bottom Layer w0.2: U1.48 -4.276,1.624 -4.2,1.7 v1(-4.2,2.34)
SEG9: LCD.5 U1.47 | length 6.1
  Top Layer w0.2: v1(-5.791,0.989) -5.371,0.569 LCD.5
  Bottom Layer w0.2: v1@-5.8,0.98 v1(-5.791,0.989) U1.47
SEG10: LCD.4 U1.46 | length 6.2
  Top Layer w0.2: v1(-6.646,0.354) -6.571,0.279 LCD.4
  Bottom Layer w0.2: v1@-6.65,0.35 v1(-6.646,0.354) U1.46
SEG11: LCD.3 U1.45 | length 8.5
  Top Layer w0.2: LCD.3 -7.75,-3.671 v1(-7.75,-4.96)
  Bottom Layer w0.2: v1@-7.69,-4.9 -7.31,-4.52 -7.31,-0.97 -6.621,-0.281 U1.45
SEG12: LCD.2 U1.44 | length 12.2
  Top Layer w0.2: LCD.2 -8.971,-6.317 v1(-8.95,-6.338)
  Bottom Layer w0.2: v1(-8.95,-6.338) -7.058,-6.338 -6.81,-6.09 -6.81,-1.34 -6.386,-0.916 U1.44
SEG13: LCD.1 U1.43 | length 13.9
  Top Layer w0.2: v1(-10.2,-6.98) -10.171,-6.951 LCD.1
  Bottom Layer w0.2: v1(-10.2,-6.98) -6.88,-6.98 -6.32,-6.42 -6.32,-1.9 -5.971,-1.551 U1.43
SWCLK: pad.4@-16.15,-14.87 U2.24 | length 6.5
  Bottom Layer w0.2: pad.4@-16.15,-14.87 -15.33,-14.87 -14.39,-15.81 -14.39,-20.146 U2.24
SWDIO: pad.4@-15.72,-12.54 U2.23 | length 10.3
  Top Layer w0.2: v1(-15.34,-20.52) -16.22,-19.64 -16.22,-15.15 -14.9,-13.83 v1@-14.84,-13.83
  Bottom Layer w0.2: pad.4@-15.72,-12.54 -15.64,-12.54 -14.89,-13.29 v1(-14.89,-13.78) ; v1(-15.34,-20.52) -15.209,-20.651 U2.23
TX: pad.4@-14.56,-7.88 R14.2 | length 15
  Top Layer w0.2: v1(-16.75,-21) -17.24,-20.51 -17.24,-14.3 -15.43,-12.49 v1@-15.43,-7.86
  Bottom Layer w0.2: R14.2 -16.75,-21.877 v1(-16.75,-21)
  other v1: -15.45,-7.85
VBAT: @0_4_1.1 pad.2@6.83,-41.39 Q2.2 | length 8.4
  Bottom Layer w0.6: Q2.2 4.536,-41.39 6.83,-41.39 9.57,-41.39 10.814,-40.146
VDD: C2.2 C8.1 C9.1 C10.2 C19.2 C20.2 pad.4@-16.75,-19.44 Q3.2 R5.1 R10.2 R11.1 R12.1 R18.2 S4.2 U2.1 U2.17 U3.13 U4.1@-1.799,-32.39 | length 100.3
  Top Layer w0.5: v2(-5.93,-16.254) -4.816,-16.254 -3.98,-17.09 v2(-3.98,-25.86) ; v2(-2.12,-28.48) v2(-2.12,-25.97)
  Bottom Layer w0.3: C10.2 -14.78,-24.56 -14.78,-23.82 -14.611,-23.651 U2.17 ; U2.1 -9.395,-18.935 -8.48,-18.02 C2.2
  Bottom Layer w0.4: pad.4@-16.75,-19.44 -17.13,-19.44 -17.61,-19.92 -17.61,-23.48 -16.54,-24.55 -14.79,-24.55 -14.78,-24.56 ; C10.2 -14.78,-27.86 -14.45,-28.19 R18.2 ; R5.1 -10.44,-16.49 -9.98,-16.03 -6.154,-16.03 v2(-5.93,-16.254) -5.921,-16.254 -5.921,-16.432 -7.39,-17.9 C2.2 ; S4.2 0.94,-43.72 1.6,-44.38 1.6,-48.9 2.394,-49.694 R10.2 ; C20.2@-2.827,-35.092 -2.827,-35.047 -1.799,-34.019 U4.1@-1.799,-32.39
  Bottom Layer w0.5: R18.2 -13.713,-29.747 -13.1,-30.36 -9.83,-30.36 -9.26,-30.93 -9.26,-34.08 -6.89,-36.45 C19.2@-3.127,-36.45 ; R12.1 -2.22,-25.87 v2(-2.12,-25.97) -1.277,-25.127 C9.1 -1.602,-24.395 C8.1 -1.325,-23.497 U3.13 ; R11.1 v1@-3.978,-23.917 ; S4.2 -4.471,-38.972 -3.849,-38.349 Q3.2 -2.827,-37.964 -2.827,-35.092 -3.55,-34.369 -3.55,-30.1 -2.12,-28.67 v2(-2.12,-28.48)
  other v1: -4,-23.91
VDDA: C6.2 R12.2 U2.5 | length 5.8
  Bottom Layer w0.2: U2.5 -7.939,-22.151 -7.24,-22.85 -7.24,-24.33 -6.67,-24.9 C6.2 -6.58,-25.853 R12.2
VS: C3.2 C5.2 R17.2 R20.2 U3.15 U3.16 | length 38
  Top Layer w0.4: v2(4.83,-24.96) 4.84,-24.97 v2(10.22,-24.97)
  Top Layer w0.5: v2(2.53,-18.34) 3.6,-18.34 4.83,-19.57 v2(4.83,-24.96)
  Bottom Layer w0.4: C3.2 -1.559,-20.957 U3.15 ; v2(4.83,-24.96) 4.83,-28.99 5.61,-29.77 9.16,-29.77 10.15,-30.76 11.751,-30.76 12.023,-30.487 R20.2 ; v2(10.22,-24.97) 10.23,-24.96 R17.2
  Bottom Layer w0.5: C3.2 -1.602,-19.855 C5.2 -1.327,-18.807 -0.86,-18.34 v2(2.53,-18.34) ; U3.15 U3.16
pads on no net: BUZ.2 BUZ.G@3.618,-54.674 S4.3 S4.4 U1.10 U1.14 U1.15 U1.18 U1.19 U1.20 U1.25 U1.26 U1.27 U1.28 U1.29 U1.30 U1.31 U1.32 U1.33 U1.34 U1.35 U1.36 U1.37 U1.38 U1.39 U1.40 U1.41 U1.42 U2.16 U2.18 U2.21 U2.22 U2.32 U3.6

## Polygon pours and split planes (outlines as drawn)
AGND on Top Layer "Bottom Layer-GND" (hatched 90Degree grid 0.2 track 0.2, remove dead copper, pour order 0): 17.05,-31.83 17.01,-31.79 14.85,-31.79 11.91,-31.79 10.01,-29.89 9.07,-28.95 5.975,-28.95 5.44,-28.392 5.44,-26.18 5.44,-25.21 5.71,-24.94 5.09,-24.32 4.89,-24.32 4.89,-17.77 5.41,-17.25 5.6,-17.06 18.13,-17.06 18.32,-17.06 18.81,-17.55 18.97,-17.71 18.97,-22.44 18.97,-30.81 18.22,-31.56 17.98,-31.8 17.12,-31.8
GND on Top Layer "Bottom Layer-GND" (hatched 90Degree grid 0.2 track 0.2, remove dead copper, pour order 18): -28.42,10.36 -28.42,9.92 22.79,9.92 23.55,9.92 23.55,-37.01 23.55,-67.1 -21.85,-67.1 -28.09,-67.1 -28.09,9.92
AGND on Bottom Layer "Bottom Layer-GND" (hatched 90Degree grid 0.2 track 0.2, remove dead copper, pour order 2): 15.9,-31.89 11.87,-31.89 9.33,-29.35 9.07,-29.09 5.66,-29.09 5.29,-28.72 5.29,-27.57 5.29,-17.311 4.969,-16.99 4.879,-16.9 -1.2,-16.9 -1.75,-16.9 -2.23,-17.38 -2.44,-17.59 -2.44,-19.76 -2.44,-21.56 -2.56,-21.68 -2.62,-21.74 -3.35,-21.74 -3.39,-21.74 -3.49,-21.64 -3.48,-21.63 -3.48,-19.96 -3.48,-15.64 -3.1,-15.26 -3.03,-15.33 18.64,-15.33 18.64,-30.459 17.56,-31.539 17.209,-31.89
GND on Bottom Layer "Bottom Layer-GND" (hatched 90Degree grid 0.2 track 0.2, remove dead copper, pour order 16): -24.7,7.08 -24.7,7.41 20.6,7.41 20.38,7.41 20.38,-27.39 20.38,-66.56 -21.52,-66.56 -24.37,-66.56 -24.37,7.08

## Keep-outs
Keep-Out Layer:
  circle w0.127: c6.728,-38.42 r0.8
  circle w0.127: c-11.179,0 r1.22
  circle w0.127: c11.178,-0.02 r1.22
  circle w0.127: c-10.122,-36.57 r1.22
  circle w0.127: c10.128,-36.52 r1.22
  circle w0.127: c-6.722,-38.32 r0.8
  circle w0.127: c6.728,-38.42 r0.8
  lines w0.15: -16.891,-31.375 ccw(c20.247,-22.39) -9.448,-46.436 ; -16.886,-31.396 cw(c29.81,-19.84) -13.681,0.718 ; -13.666,0.751 -11.2,5.168 11.3,5.168 ; -9.441,-46.445 -7.415,-55.732 -5.058,-58.678 -5.036,-66.017 5.03,-65.997 5.03,-58.701 ; 11.303,5.163 cw(c-38.433,-22.235) 18.305,-19.956 ; 16.61,-31.539 ccw(c-10.201,-21.622) 17.584,-28.343 ; 16.617,-31.518 14.278,-38.301 14.062,-38.764 12.711,-41.447 9.559,-46.438 ; 17.591,-28.311 18.306,-20.001 ; 5.03,-58.701 7.435,-55.639 ; 5.03,-58.701 7.435,-55.639 ; 7.435,-55.639 9.559,-46.438 ; 7.435,-55.639 9.559,-46.438

## Other copper
Top Layer:
  rectangle net GND: -0.431,-51.97 0.51,-48.61
  pour cut-out: 18.58,-29.32 14.03,-29.32 14.03,-16.93 18.96,-16.93 18.96,-29.37 18.56,-29.37
  pour cut-out: -17.27,-6.15 -17.27,6.82 19.84,6.82 19.84,-5.53 -16.857,-5.53
  pour cut-out: 7.011,-30.69 -2.989,-30.69 -2.989,-34.09 7.011,-34.09
Bottom Layer:
  pour cut-out: 18.58,-29.32 14.03,-29.32 14.03,-16.93 18.96,-16.93 18.96,-29.37 18.56,-29.37
  pour cut-out: -17.27,-6.15 -17.27,6.82 19.84,6.82 19.84,-5.53 -16.857,-5.53
  pour cut-out: 7.011,-30.69 -2.989,-30.69 -2.989,-34.09 7.011,-34.09

## Silkscreen, mask and mechanical layers (free items; w line width, h text height)
Top Overlay:
  lines w0.1: -11.179,0 11.178,0
  lines w0.127: -2.712,-43.562 -2.712,-39.912 2.788,-39.912 2.788,-43.562 -2.692,-43.562
  text "COM1" at 11.893,-5.331 h0.7 r90
  text "LED1" at -3.82,-53.58 h0.8
  text "LED2" at 1.51,-53.61 h0.8
  text "+" at -0.18,-53.68 h1
  text "+" at 2.31,-62.045 h1.5
Bottom Overlay:
  region: 9.5,-46.96 9.5,-44.16 7.57,-44.16 7.57,-46.96
  rectangle: 9.36,-41.31 12.27,-39.08
  lines w0.1: -2.95,-48.832 3.05,-48.832 3.05,-42.832 -2.95,-42.832 -2.95,-48.832
  text "2020.04.26" at 4.025,3.228 h1
  text "BOOT0" at -9.22,-5.92 h0.7
  text "CS" at 15.07,-7.51 h0.7
  text "TX" at -11.24,-8.36 h0.7
  text "WR" at 14.21,-9.5 h0.7
  text "RX" at -11.92,-10.65 h0.7
  text "DATA" at 14.28,-11.52 h0.7
  text "SIC20122-1V0" at -8.14,-11.67 h1 r270
  text "DIO" at -11.95,-12.96 h0.7
  text "1" at 16.11,-12.955 h0.7
  text "LCD_VDD" at 13.24,-13.59 h0.7
  text "3" at 16.227,-14.275 h0.7
  text "CLK" at -12.1,-15.22 h0.7
  text "4" at 16.227,-15.645 h0.7
  text "GND" at -12.17,-16.84 h0.7
  text "2" at 16.227,-17.025 h0.7
  text "VDD" at -12.15,-18.11 h0.7
  text "UP" at 4.98,-36.17 h0.7 r270
  text "VDD" at 2.394,-36.46 h0.7 r270
  text "SET" at 6.369,-36.56 h0.7 r270
  text "DOWN" at 3.73,-37.2 h0.7 r270
  text "B+" at 8.431,-40.58 h1
  text "B-" at 6.25,-46.1 h1 r270
  text "+" at 1.701,-61.605 h1.5 r270
  text "+" at 4.42,-65.585 h1.5
  text "-" at -3.258,-65.625 h1.5
Drill Drawing:
  lines w0.025: -0.012,-66.001 -0.012,-66